# EAGLE board RadioMusic_Panel (EAGLE 6.6.0)
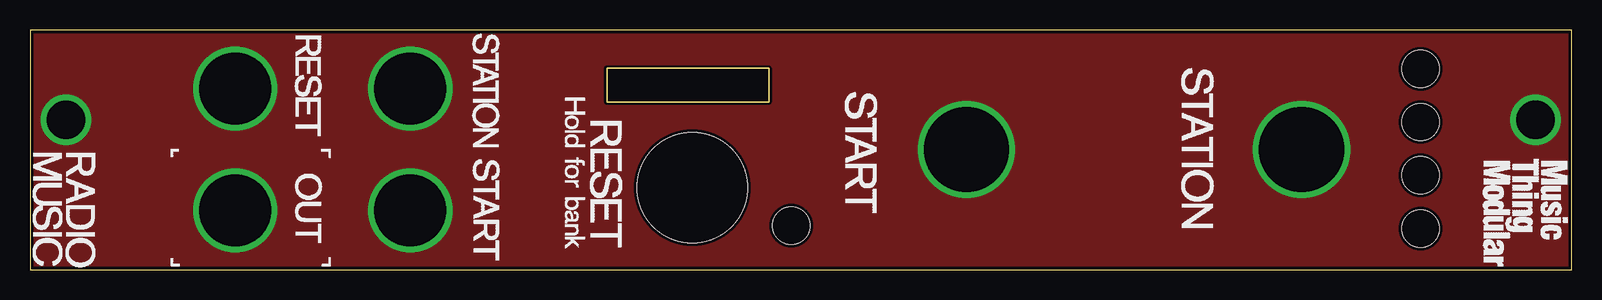
[diagram p0: board, top side]
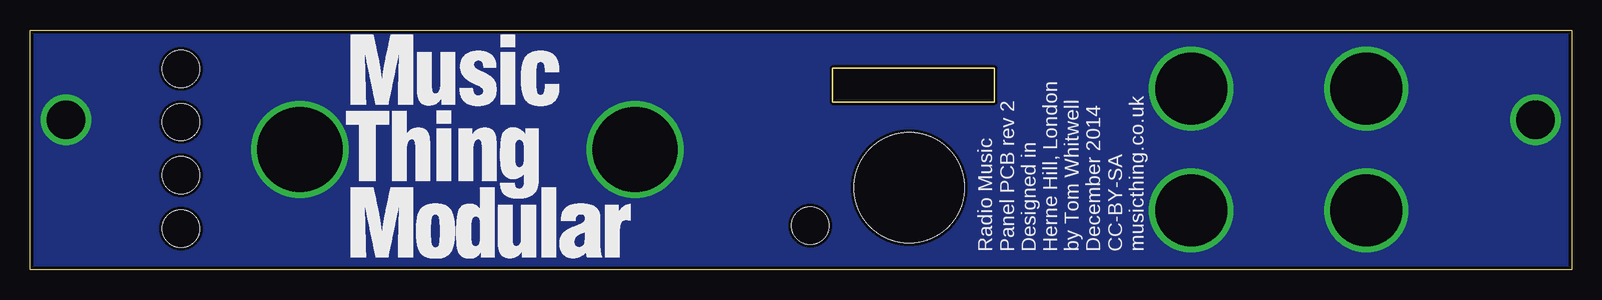
[diagram p1: board, bottom side, seen from below]

Size 128.5 x 20 mm. Coordinates in mm from the lower left corner, seen from the top.
Outline: 0,20 0,0 128.5,0 128.5,20 0,20
Outline: 48.1,16.8 61.6,16.8 61.6,14 48.1,14 48.1,16.8
Copper layers (1*2*15*16): Top 0.035mm / dielectric 0.2mm / Route2 0.0175mm / dielectric 1.1mm / Route15 0.0175mm / dielectric 0.2mm / Bottom 0.035mm
Design rules "SeeedStudio_DRU_no_angle_20130527": minimum track width 6mil, minimum drill 12mil, track to track 6mil, track to pad 6mil, pad to pad 6mil, via to via 6mil, smd to smd 0mil, copper to edge 10mil, drill to drill 10mil, minimum pad ring 6mil, minimum via ring 6mil, stop-mask expansion 2mil, vias tented up to drill 25mil, thermal gap 10mil
Net classes: 0 default: width 0.203 mm; 1 power: width 0.305 mm; 2 ground: width 0.305 mm
Holes 3.1 mm at 63.45,3.67 115.91,16.76 115.91,12.31 115.91,7.87 115.91,3.42
Holes 9.2 mm at 55.2,6.85
Milling: area 48.1,14 to 61.6,16.8

## Placement (x,y rotation side)
U$1  [MTM_2CM]  102.3,0 0 bottom

## Library data of the parts
U$1 = TW_logos

## Tracks (layer width: path | path; a pad name or v marks a point on that pad's centre or on a via)
GND  (via drill 3.2, 6, 7.1)
  other vias: 17.1,15.11 31.7,15.11 17.1,4.95 31.7,4.95 78.06,10.03 3,12.5 106,10.03 125.5,12.5
  pour Bottom: -1.69,21.67 130.46,21.67 130.46,-4.23 -1.69,-4.23 -1.69,21.59
  pour Top: -3.3,26.4 133.1,26.4 133.1,-6.6 -3.3,-6.6

## Text on the board
bPlace: Radio Music / Panel PCB rev 2 / Designed in / Herne Hill, London / by Tom Whitwell / December 2014 / CC-BY-SA / musicthing.co.uk